# EAGLE board boost converter non micro (EAGLE 9.6.2)
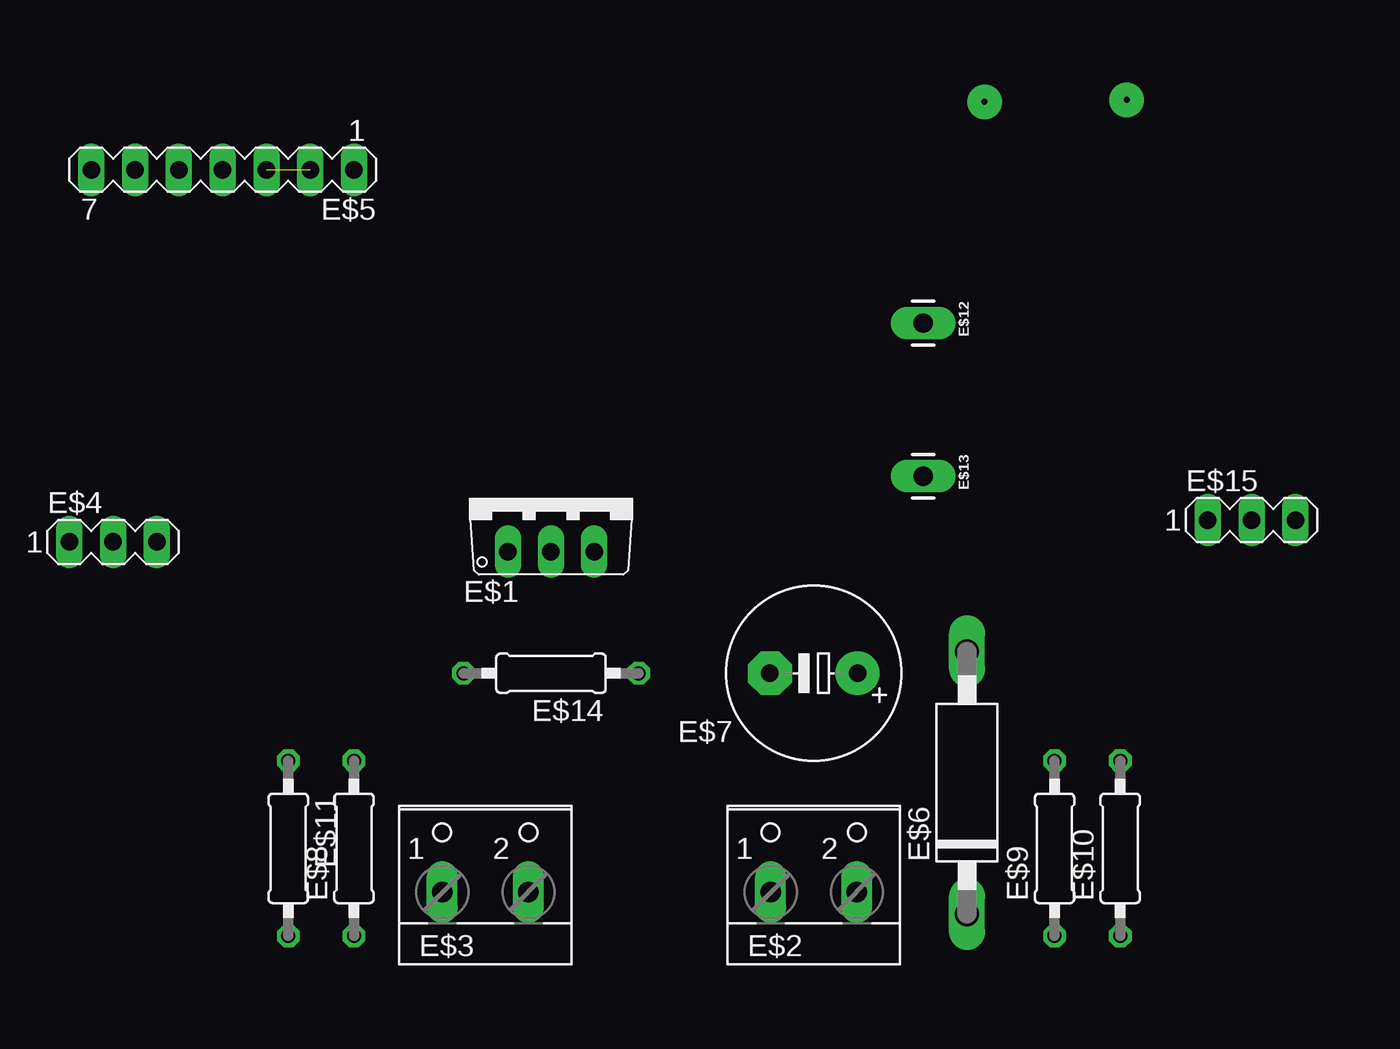
[diagram p0: board, top side]
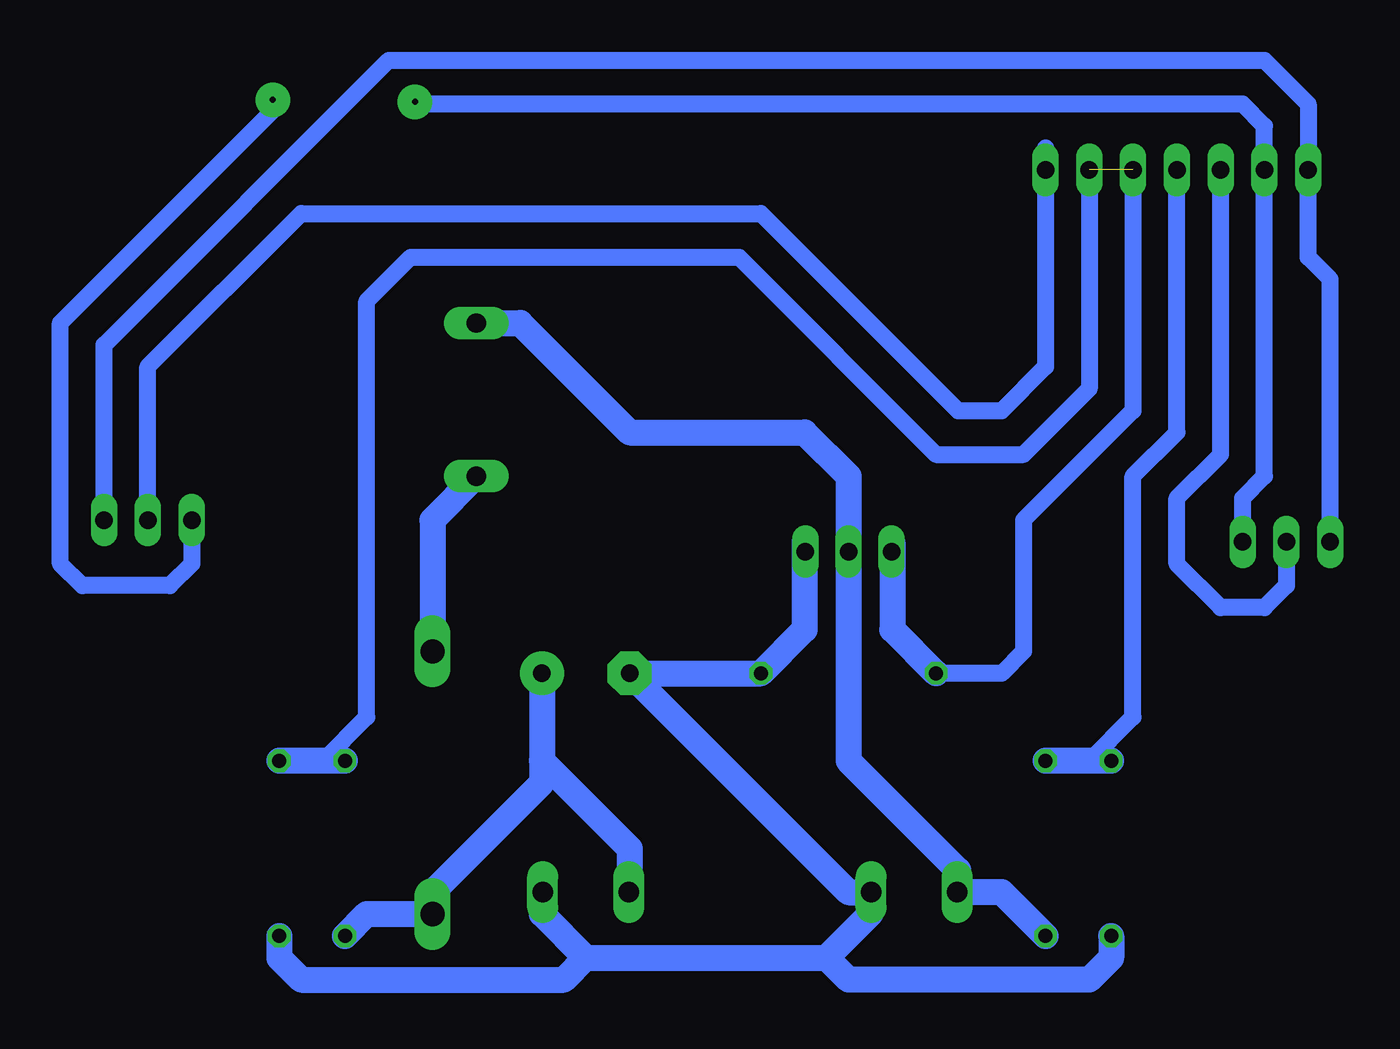
[diagram p1: board, bottom side, seen from below]

No outline drawn. Coordinates in mm, seen from the top.
Copper layers (1*16): Top 0.035mm / dielectric 1.5mm / Bottom 0.035mm
Design rules "default *": minimum track width 6mil, minimum drill 0.35mm, track to track 0mil, track to pad 0mil, pad to pad 0mil, via to via 0mil, smd to smd 6mil, copper to edge 0mil, drill to drill 0mil, minimum pad ring 10mil, minimum via ring 8mil, stop-mask expansion 4mil, vias tented up to drill 0mil, thermal gap 0mil

## Footprints (pad centres in the part's own frame; a part is rotated, then mirrored left to right if it is on the bottom)
T-30_V = drill 1.016 long: 1 -2.5,-3.1; 2 0,-3.1; 3 2.5,-3.1
W237-102 = drill 1.194 long: 1 -2.5,-1.27; 2 2.5,-1.27
MA03-1 = drill 1.016 long: 1 -2.54,0; 2 0,0; 3 2.54,0
MA07-1 = drill 1.016 long: 1 -7.62,0; 2 -5.08,0; 3 -2.54,0; 4 0,0; 5 2.54,0; 6 5.08,0; 7 7.62,0
CB417-15 = drill 1.397 long: A 7.62,0; C -7.62,0
E5-10,5 = drill 1.016 pad 2.54: + -2.54,0 | drill 1.016 pad 2.54 octagon: - 2.54,0
0207/10 = drill 0.813 octagon: 1 -5.08,0; 2 5.08,0
1X01_LONGPAD = drill 1.118 pad 1.88 long: 1 0,0

## Placement (x,y rotation side)
E$1  [T-30_V]  20.32,43.18 0 top
E$2  [W237-102]  35.56,21.59 0 top
E$3  [W237-102]  16.51,21.59 0 top
E$4  [MA03-1]  -5.08,40.64 0 top
E$5  [MA07-1]  1.27,62.23 180 top
E$6  [CB417-15]  44.45,26.67 90 top
E$7  [E5-10,5]  35.56,33.02 180 top
E$8  [0207/10]  8.89,22.86 90 top
E$9  [0207/10]  49.53,22.86 90 top
E$10  [0207/10]  53.34,22.86 90 top
E$11  [0207/10]  5.08,22.86 270 top
E$12  [1X01_LONGPAD]  41.91,53.34 270 top
E$13  [1X01_LONGPAD]  41.91,44.45 270 top
E$14  [0207/10]  20.32,33.02 180 top
E$15  [MA03-1]  60.96,41.91 0 top

## Library data of the parts
E$1 = transistor
E$2 E$3 = con-wago-500
E$4 E$5 E$15 = con-lstb
E$6 = adafruit
E$7-E$11 E$14 = rcl
E$12 E$13 = SparkFun-Connectors

## Nets
S$1: E$4.1 E$5.7 E$15.3
S$2: E$15.1
S$3: E$5.4 E$8.2 E$11.1
S$5: E$4.3 E$5.6
S$6: E$6.C E$7.+ E$9.1
S$7: E$6.A E$13.1
S$8: E$8.1 E$12.1
S$9: E$7.- E$10.1 E$11.2 E$14.1
S$10: E$4.2 E$5.5
S$11: E$15.2
S$12: E$5.2 E$5.3 E$9.2 E$10.2 E$14.2

## Tracks (layer width: path | path; a pad name or v marks a point on that pad's centre or on a via)
S$1
  Bottom 1: E$15.3 63.5,52.07 46.99,68.58 -3.81,68.58 -6.35,66.04 E$5.7 -6.35,57.15 -7.62,55.88 E$4.1
S$2
  Bottom 1: E$15.1 58.42,39.37 59.69,38.1 64.77,38.1 66.04,39.37 66.04,53.34 53.34,66.04 53.34,66.17
S$3
  Bottom 1: 6.35,27.94 3.81,30.48 3.81,44.45 1.27,46.99 E$5.4
  Bottom 1.5: E$11.1 6.35,27.94 E$8.2
S$4  (via drill 0.35 pad 2)
  other vias: 45.47,66.17
S$5
  Bottom 1: E$4.3 -2.54,43.18 -3.81,44.45 E$5.6 -3.81,64.77 -2.54,66.04 45.72,66.04
S$6
  Bottom 1.5: 33.02,20.32 33.02,22.86 38.1,27.94 E$7.+ 38.1,26.67 44.45,20.32 E$6.C 48.26,19.05 E$9.1
S$7
  Bottom 1.5: E$13.1 44.45,41.91 E$6.A
S$8
  Bottom 1.5: E$12.1 39.37,53.34 33.02,46.99 22.86,46.99 20.32,44.45 20.32,27.94 13.97,21.59 13.97,20.32 11.43,20.32 E$8.1
S$9
  Bottom 1.5: E$10.1 53.34,16.51 52.07,15.24 36.83,15.24 35.56,16.51 | E$11.2 5.08,16.51 6.35,15.24 20.32,15.24 21.59,16.51 | 22.86,40.64 22.86,35.56 E$14.1 E$7.- 20.32,20.32 19.05,20.32 19.05,19.05 21.59,16.51 | 38.1,20.32 38.1,19.05 35.56,16.51 | 35.56,16.51 21.59,16.51
S$10
  Bottom 1: E$4.2 -5.08,38.1 -3.81,36.83 -1.27,36.83 1.27,39.37 1.27,43.18 -1.27,45.72 E$5.5
S$11
  Bottom 1: E$15.2 60.96,50.8 52.07,59.69 25.4,59.69 13.97,48.26 11.43,48.26 8.89,50.8 8.89,63.5
S$12  (1 unrouted)
  Bottom 1: 6.35,60.96 E$5.2 6.35,49.53 10.16,45.72 15.24,45.72 26.67,57.15 45.72,57.15 48.26,54.61 48.26,30.48 50.8,27.94 | E$5.3 3.81,48.26 10.16,41.91 10.16,34.29 11.43,33.02 E$14.2
  Bottom 1.5: E$9.2 50.8,27.94 E$10.2 | 17.78,40.64 17.78,35.56 E$14.2
S$13  (via drill 0.35 pad 2)
  other vias: 53.72,66.29